# EAGLE board tdlf_08_15_2021_server_top_modulaire (EAGLE 9.6.2)
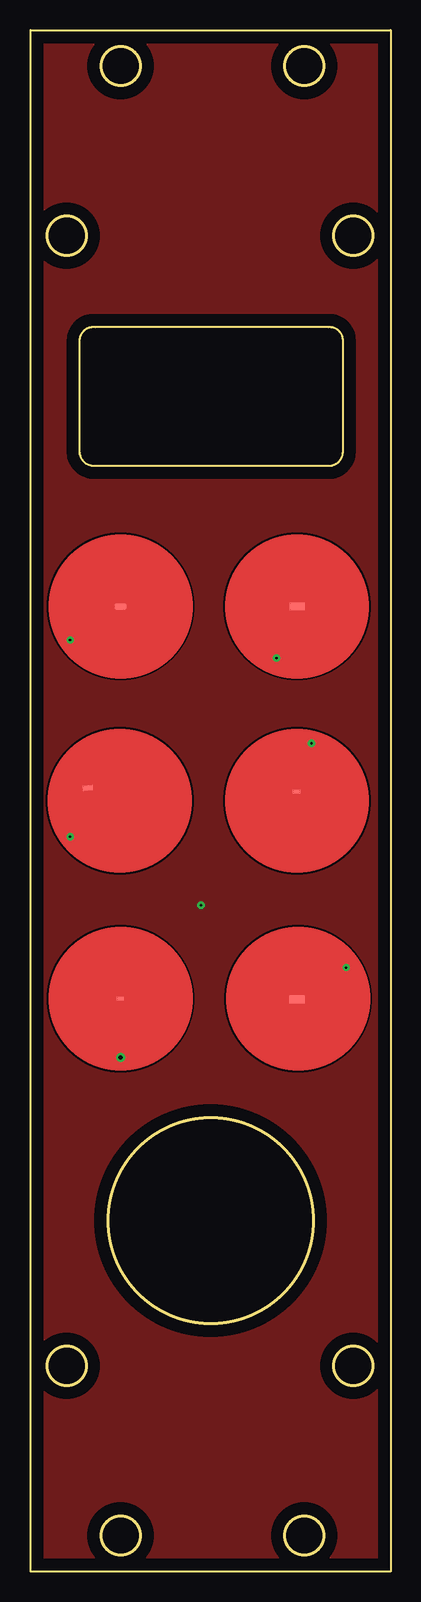
[diagram p0: board, top side]
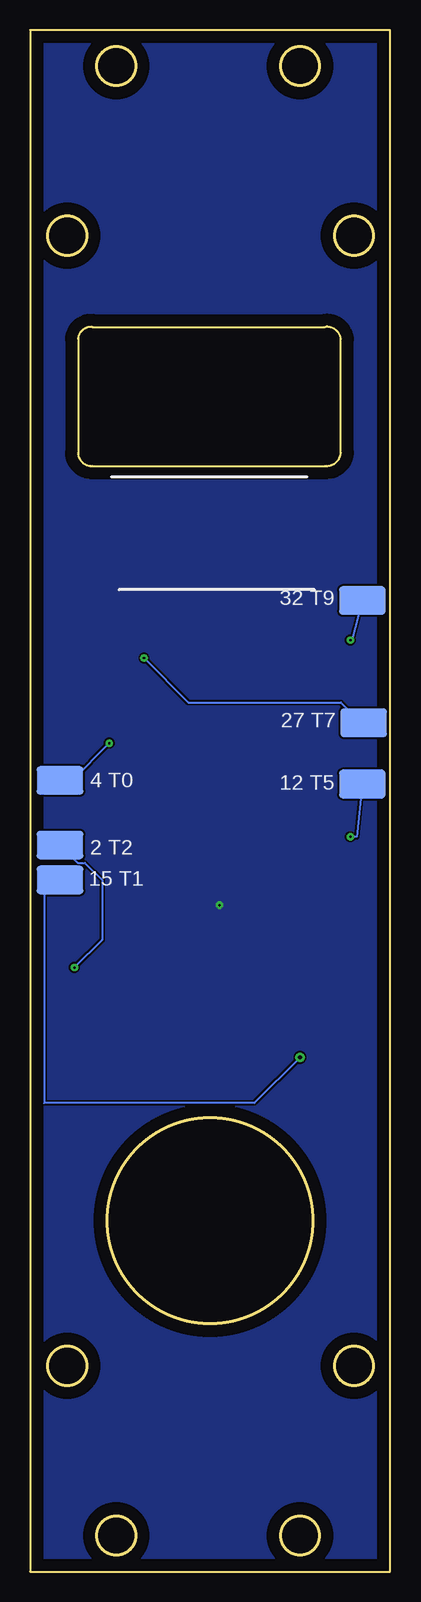
[diagram p1: board, bottom side, seen from below]

Size 30 x 128.5 mm. Coordinates in mm from the lower left corner, seen from the top.
Outline: 0,0 0,128.5 30,128.5 30,0 0,0
Outline: 24.8,103.75 5.4,103.75 arc90 4.1,102.75 4.1,93.25 arc90 5.4,92.15 24.8,92.15 arc90 26,93.25 26,102.75 arc90 24.8,103.75
Outline: circle at 26.9,111.35 radius 1.62
Outline: circle at 3,111.35 radius 1.62
Outline: circle at 3,17.15 radius 1.62
Outline: circle at 26.9,17.15 radius 1.62
Outline: circle at 15,29.25 radius 8.54
Outline: circle at 22.81,125.5 radius 1.62
Outline: circle at 7.5,125.5 radius 1.62
Outline: circle at 22.81,3 radius 1.62
Outline: circle at 7.5,3 radius 1.62
Copper layers (1*16): Top 0.035mm / dielectric 1.5mm / Bottom 0.035mm
Design rules "default": minimum track width 6mil, minimum drill 0.35mm, track to track 6mil, track to pad 6mil, pad to pad 6mil, via to via 6mil, smd to smd 6mil, copper to edge 40mil, drill to drill 6mil, minimum pad ring 10mil, minimum via ring 8mil, stop-mask expansion 4mil, vias tented up to drill 0mil, thermal gap 10mil

## Footprints (pad centres in the part's own frame; a part is rotated, then mirrored left to right if it is on the bottom)
TDLF_CAP_02 = smd 0.813 x 0.406: P$1 -2.55,2.1
TDLF_CAP_PLUS = smd 1.016 x 0.508: P$1 0,0
LUXEON-PAD = smd 3.9 x 2.4: P$1 0,0
TDLF_CAP_MOINS = smd 1.27 x 0.635: P$1 0.025,0
TDLF_CAP_SPIRAL = smd 0.61 x 0.305: P$1 -0.025,0
TDLF_CAP_KOPIMI = smd 0.61 x 0.305: P$1 -0.051,0.762
TDLF_CAP_ACHTUNG = smd 1.27 x 0.66: P$1 -0.102,-0.051

## Placement (x,y rotation side)
CAP_MUSH  MUSH  [TDLF_CAP_02]  7.5,63.45 5 top
CAP_PLUS  [TDLF_CAP_PLUS]  7.5,80.45 0 top
JP1  [LUXEON-PAD]  2.3,65.65 0 bottom
JP2  [LUXEON-PAD]  2.2,70.75 0 bottom
JP3  [LUXEON-PAD]  2.3,80.95 0 bottom
JP4  [LUXEON-PAD]  27.5,57.65 0 bottom
JP5  [LUXEON-PAD]  27.5,65.95 0 bottom
JP7  [LUXEON-PAD]  27.5,60.55 0 bottom
U$1  [TDLF_CAP_MOINS]  22.2,80.45 0 top
U$2  [TDLF_CAP_SPIRAL]  7.5,47.75 0 top
U$3  [TDLF_CAP_KOPIMI]  22.2,64.25 0 top
U$4  [TDLF_CAP_ACHTUNG]  22.3,47.75 0 top

## Library data of the parts
CAP_MUSH CAP_PLUS U$1-U$4 = alx_lib
JP1-JP5 JP7 = SparkFun-Connectors

## Nets
CHAMPI: CAP_MUSH.P$1 JP1.P$1
KOPIMI: JP5.P$1 U$3.P$1
MOINS: JP2.P$1 U$1.P$1
N$1: JP7.P$1 U$4.P$1
PLUS: CAP_PLUS.P$1 JP3.P$1
SPIRAL: JP4.P$1

## Tracks (layer width: path | path; a pad name or v marks a point on that pad's centre or on a via)
CHAMPI  (via drill 0.2)
  Top 0.152: CAP_MUSH.P$1 4.78,62.73 v3.3,61.25
  Bottom 0.152: JP1.P$1 2.77,61.25 v3.3,61.25
GND  (via drill 0.2)
  other vias: 14.2,55.55
  pour Bottom: 0,128.45 29.9,128.45 30,128.35 30,0.35 29.8,0.15 0,0.15
  pour Top: 0.2,128.46 29.9,128.16 29.9,0.25 0.2,0.25
KOPIMI  (via drill 0.2)
  Top 0.152: v23.4,69.05 22.15,67.8 U$3.P$1
  Bottom 0.152: JP5.P$1 26.5,65.95 v23.4,69.05
MOINS  (via drill 0.2)
  Top 0.152: v20.5,76.15 20.5,77.67 21.67,79.89 U$1.P$1
  Bottom 0.152: JP2.P$1 2.3,70.65 | 2.3,70.65 2.55,70.4 | v20.5,76.15 16.8,72.45 4.1,72.45 2.3,70.65
N$1  (via drill 0.2)
  Top 0.152: v26.3,50.35 24.85,50.35 U$4.P$1
  Bottom 0.152: JP7.P$1 26.03,59.08 25.43,59.08 24,57.65 24,52.65 v26.3,50.35
PLUS  (via drill 0.2)
  Top 0.152: CAP_PLUS.P$1 6.1,80.45 v3.3,77.65
  Bottom 0.152: JP3.P$1 3.2,77.55 3.3,77.55 v3.3,77.65
SPIRAL  (via drill 0.35)
  Top 0.152: 7.47,42.88 v7.5,42.85 7.5,47.75
  Bottom 0.152: JP4.P$1 28.83,57.65 28.83,39.05 11.3,39.05 v7.5,42.85

## Text on the board
bNames: 32 T9 | 27 T7 | 12 T5 | 4 T0 | 2 T2 | 15 T1
tStop: Technologies / de la fête | v 0.3